# EAGLE board driverMotor (EAGLE 9.6.1)

Size 100 x 80 mm. Coordinates in mm from the lower left corner, seen from the top.
Outline: 0,0 100,0 100,80 0,80 0,0
Copper layers (1*16): Top 0.035mm / dielectric 1.5mm / Bottom 0.035mm
Design rules "default": minimum track width 6mil, minimum drill 0.35mm, track to track 6mil, track to pad 6mil, pad to pad 6mil, via to via 6mil, smd to smd 6mil, copper to edge 40mil, drill to drill 6mil, minimum pad ring 10mil, minimum via ring 8mil, stop-mask expansion 4mil, vias tented up to drill 0mil, thermal gap 10mil

## Footprints (pad centres in the part's own frame; a part is rotated, then mirrored left to right if it is on the bottom)
DO41-10 = drill 1.118: A 5.08,0; C -5.08,0
MULTIWATT-15 = drill 1.2 long: 1 -8.89,-7.62; 2 -7.62,-2.54; 3 -6.35,-7.62; 4 -5.08,-2.54; 5 -3.81,-7.62; 6 -2.54,-2.54; 7 -1.27,-7.62; 8 0,-2.54; 9 1.27,-7.62; 10 2.54,-2.54; 11 3.81,-7.62; 12 5.08,-2.54; 13 6.35,-7.62; 14 7.62,-2.54; 15 8.89,-7.62
78MXXS = drill 1.016 long: GND 0,-2.54; IN -2.54,-2.54; OUT 2.54,-2.54
1X04 = drill 1.016 long: 1 -3.81,0; 2 -1.27,0; 3 1.27,0; 4 3.81,0
1X02 = drill 1.016 long: 1 -1.27,0; 2 1.27,0
LED5MM = drill 0.813 octagon: A -1.27,0; K 1.27,0
0411/12 = drill 0.914 octagon: 1 -6.35,0; 2 6.35,0
SMKDSP_1,5/2 = drill 1.6 pad 1.8 long: 1 -2.5,0; 2 2.5,0

## Placement (x,y rotation side)
D1  1N4004  [DO41-10]  77.47,43.18 90 top
D1.  1N4004  [DO41-10]  77.47,30.48 90 top
D2  1N4004  [DO41-10]  77.47,17.78 90 top
D2.  1N4004  [DO41-10]  88.9,38.1 270 top
D3  1N4004  [DO41-10]  88.9,50.8 270 top
D3.  1N4004  [DO41-10]  88.9,63.5 270 top
D4  1N4004  [DO41-10]  41.91,91.44 180 top  (outside the outline)
D4.  1N4004  [DO41-10]  54.61,91.44 180 top  (outside the outline)
IC1  L298  [MULTIWATT-15]  35.56,36.83 0 top
IC2  [78MXXS]  83.82,36.83 270 top
JP1  [1X04]  55.88,85.09 180 top  (outside the outline)
JP2  [1X04]  30.48,66.04 0 top
JP3  [1X02]  13.97,66.04 0 top
LED1  [LED5MM]  34.29,55.88 0 top
R1  [0411/12]  43.18,85.09 180 top  (outside the outline)
X1  SMKDSP_1,5/2  [SMKDSP_1,5/2]  7.62,8.89 0 top
X2  SMKDSP_1,5/2  [SMKDSP_1,5/2]  57.15,8.89 0 top
X3  SMKDSP_1,5/2  [SMKDSP_1,5/2]  31.75,7.62 0 top

## Library data of the parts
D1 D1. D2 D2. D3 D3. D4 D4. = diode
IC1 = st-microelectronics
IC2 = v-reg
JP1-JP3 = pinhead
LED1 = led
R1 = resistor
X1-X3 = con-phoenix-smkdsp; MF: FARNELL; MPN: 1733570; OC_FARNELL: 3041244; OC_NEWARK: 69C8588

## Nets
+5V: IC1.9 IC2.OUT JP1.2 JP3.2 R1.2
ENABLE_A: IC1.6 JP2.4
ENABLE_B: IC1.11 JP1.1
GND: D1..A D2..A D3..A D4..A IC1.1 IC1.8 IC1.15 IC2.GND JP2.3 LED1.K X1.2
INPUT1: IC1.5 JP1.4
INPUT2: IC1.7 JP1.3
INPUT3: IC1.10 JP2.2
INPUT4: IC1.12 JP2.1
LED: LED1.A R1.1
MOTOR1_1: D1..C D1.A IC1.2 X2.1
MOTOR1_2: D2..C D2.A IC1.3 X2.2
MOTOR2_1: D3..C D3.A IC1.13 X3.1
MOTOR2_2: D4..C D4.A IC1.14 X3.2
VS: D1.C D2.C D3.C D4.C IC1.4 IC2.IN JP3.1 X1.1

## Tracks (layer width: path | path; a pad name or v marks a point on that pad's centre or on a via)
+5V  (4 unrouted)
ENABLE_A  (1 unrouted)
ENABLE_B  (1 unrouted)
GND  (10 unrouted)
INPUT1  (1 unrouted)
INPUT2  (1 unrouted)
INPUT3  (1 unrouted)
INPUT4  (1 unrouted)
LED  (1 unrouted)
MOTOR1_1  (3 unrouted)
MOTOR1_2  (3 unrouted)
MOTOR2_1  (3 unrouted)
MOTOR2_2  (3 unrouted)
VS  (7 unrouted)